# Altium PCB Driver_ampli.PcbDoc
Units mm, origin at the board's own origin, x right, y up, seen from the top; angles counter-clockwise.
Board outline 39 x 30 mm, 2 copper layers (Top Layer, Bottom Layer); 23 components, 10 nets, 48 pads, 0 vias.
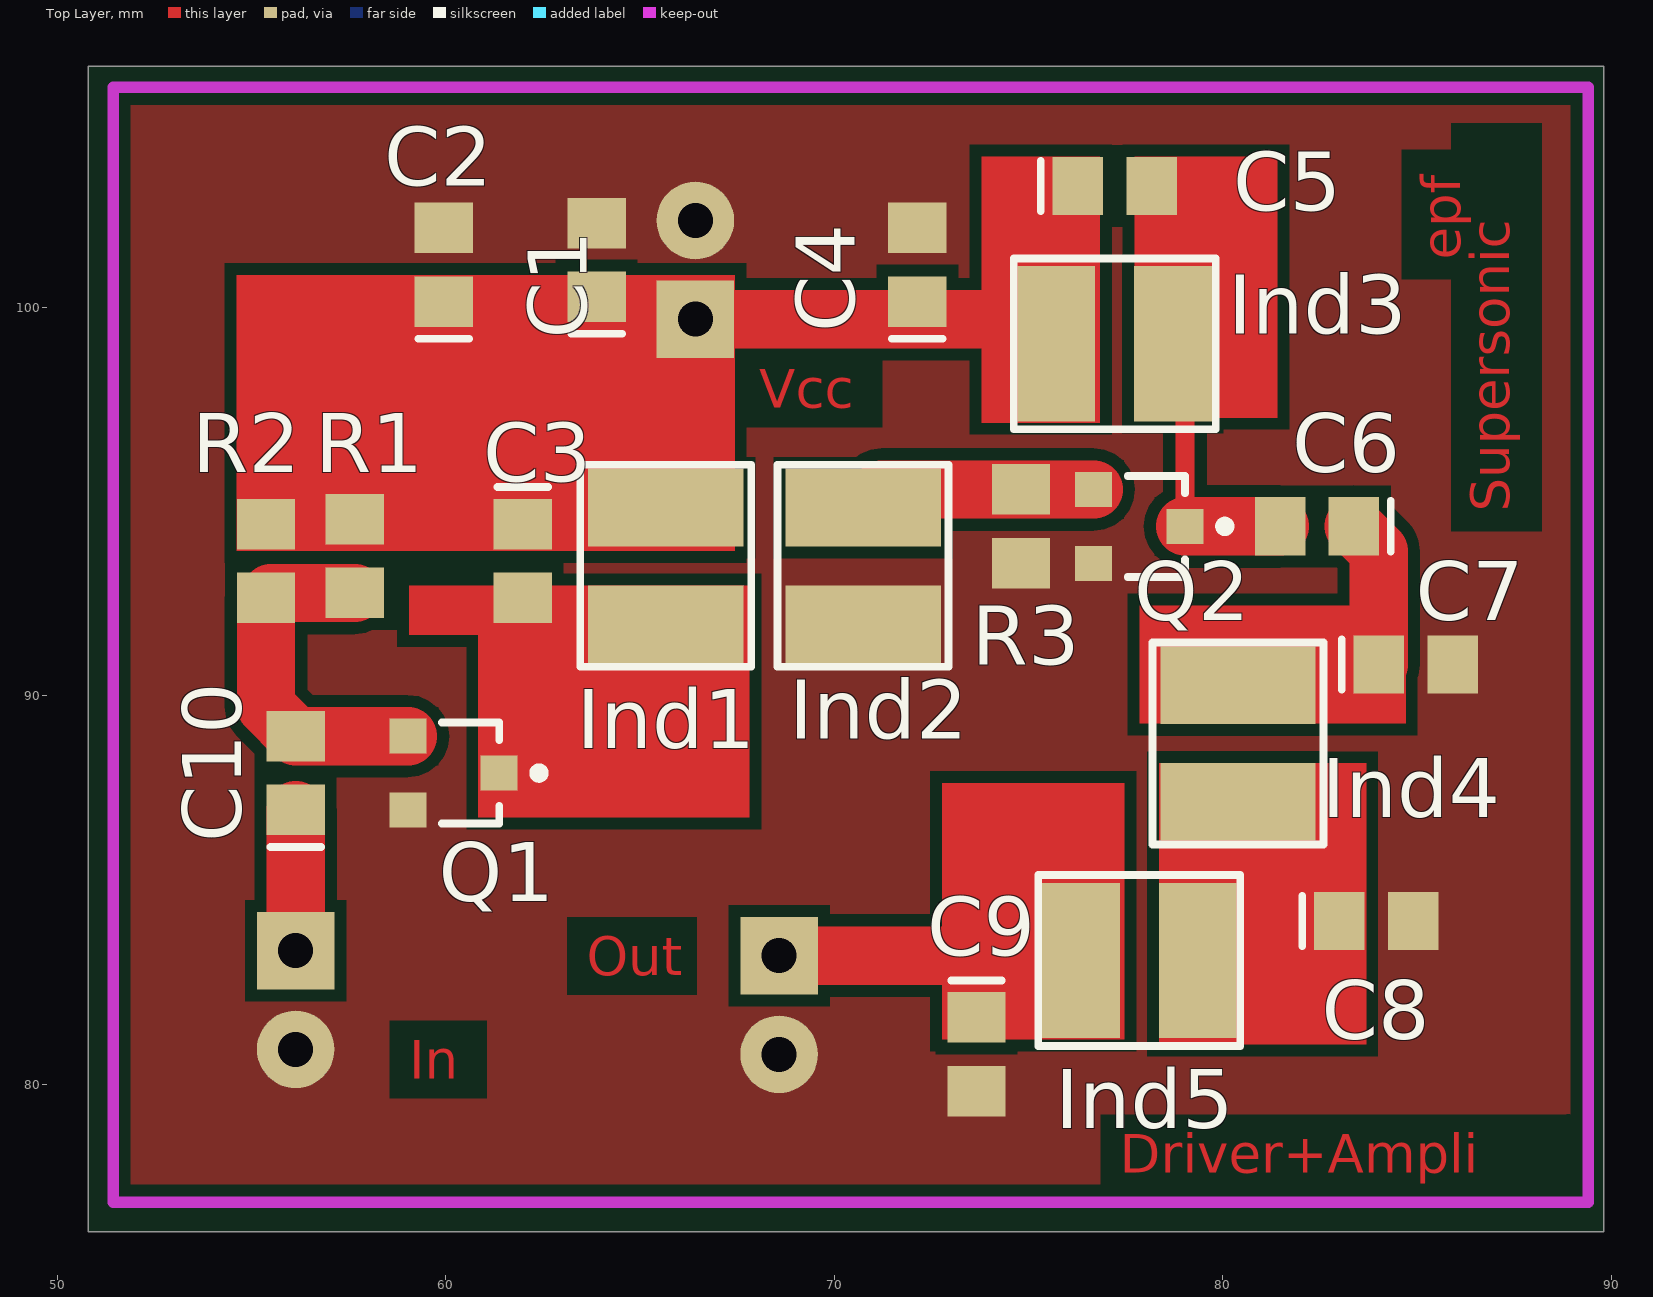
[diagram p0: Top Layer view]
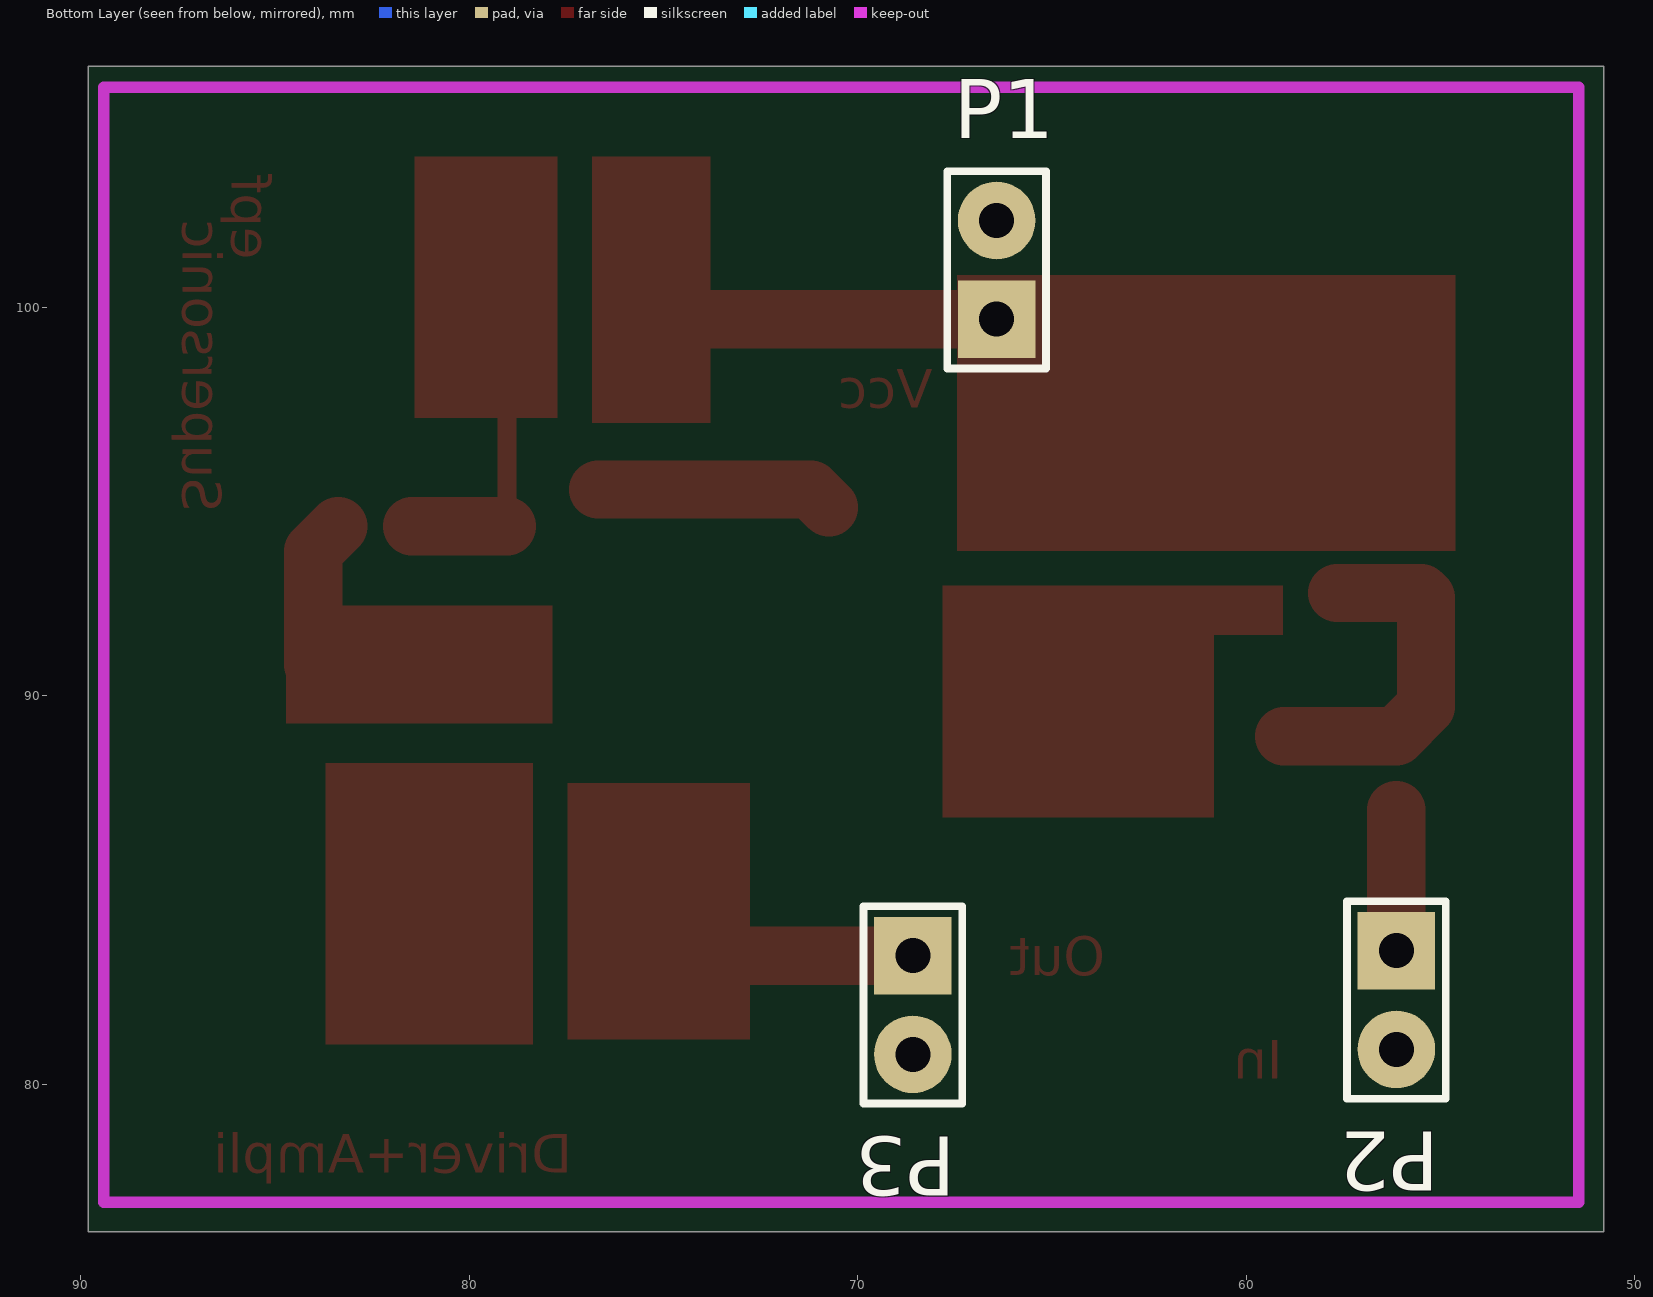
[diagram p1: Bottom Layer view, seen from below]

## Layer stack, top to bottom
Top Layer: signal copper 0.0356
Dielectric: dielectric 0.32, FR-4, Dk 4.8
Bottom Layer: signal copper 0.0356

## Board outline
50.8,76.2 89.8,76.2 89.8,106.2 50.8,106.2

## Design rules (kind name [scope] priority, off if disabled: settings)
Clearance [All] p1: gap=0.3
ComponentClearance [All] p1: gap=0.254 collisioncheckmode=3 verticalgap=0.254
PolygonConnect [All] p1: connectstyle=Direct reliefconductorwidth=0.254 reliefentries=4 polygonreliefangle="90 Angle"
RoomDefinition Driver_Ampli [InComponentClass('Driver_Ampli')] p1: confinementstyle=ConfineIn formatcopy=TRUE lockcomponents=FALSE outline 50.038,75.438 90.932,75.438 90.932,107.442 50.038,107.442
RoutingVias [All] p1: holewidth=0.8 width=2 viastyle="Through Hole" minholewidth=0.711 minwidth=1.27 maxholewidth=1 maxwidth=3
SolderMaskExpansion [All] p1: expansion=0.102
TestPointUsage [All] p1: valid=0 allowmultiple=FALSE
Testpoint [All] p1: side=15 testpointundercomponent=TRUE minsize=1.016 maxsize=2.54 preferedsize=1.524 minholesize=0 maxholesize=1.016 preferedholesize=0.813 testpointgrid=0.025 style=1023 order=0-112345678
Width [All] p1: maxlimit=3 minlimit=0.5 preferedwidth=1.5
18 further rules are at their usual default settings.

## Components (designator, comment, footprint, x,y, rotation, side; value= is the part's Value field where it differs from the comment)
C1 "Cap Pol3" C0805 63.881,101.219 r90 top
C2 "Cap Pol3" C0805 59.944,101.092 r90 top
C3 "Cap Pol3" C0805 61.976,93.472 r270 top
C4 "Cap Pol3" C0805 72.136,101.092 r90 top
C5 "Cap Pol3" C0805 77.216,103.124 r0 top
C6 "Cap Pol3" C0805 82.423,94.361 r180 top
C7 "Cap Pol3" C0805 84.963,90.805 r0 top
C8 "Cap Pol3" C0805 83.947,84.201 r0 top
C9 "Cap Pol3" C0805 73.66,80.772 r270 top
C10 "Cap Pol3" C0805 56.134,88.011 r90 top
Ind1 "Ind2" Ind_3mm 65.659,93.345 r270 top
Ind2 "Ind2" Ind_3mm 70.739,93.345 r270 top
Ind3 "Ind2" Ind_3mm 77.216,99.06 r0 top
Ind4 "Ind2" Ind_3mm 80.391,88.773 r270 top
Ind5 "Ind2" Ind_3mm 77.851,83.185 r180 top
P1 "Header 2" HDR1X2 66.421,99.695 r90 bottom
P2 "Header 2" HDR1X2 56.134,83.439 r270 bottom
P3 "Header 2" HDR1X2 68.58,83.312 r270 bottom
Q1 "BFS17" SOT23 60.198,88.011 r270 top
Q2 "BFS17" SOT23 77.851,94.361 r270 top
R1 "Res Semi" 2012[0805] 57.658,93.599 r90 top
R2 "Res Semi" 2012[0805] 55.372,93.472 r90 top
R3 "Res Semi" 2012[0805] 74.803,94.361 r90 top

## Footprints (in the part's own frame and the unit in brackets; to place one, negate y for a bottom-side part, rotate by r counter-clockwise, add the part's x,y. Pads: shape width x height; smd on the part's side, far side on the other; paste and mask are expansions set on the pad)
2012[0805] [mm] "Chip Resistor; Body 2.0 x 1.3 mm (LxW typ)"
  rect 1.3x1.5 smd: 1(-0.95,0) 2(0.95,0)
C0805 [mm] "Chip Capacitor; Body 2.0 x 1.2 mm (LxW typ)"
  rect 1.3x1.5 smd: 1(-0.95,0) 2(0.95,0)
  silkscreen extent -1.9,-0.65 -1.9,0.65
HDR1X2 [mm] "Connector; Header; 2 Position"
  rect 2x2 hole 0.9: 1(0,0)
  round 2 hole 0.9: 2(2.54,0)
  silkscreen extent -1.27,-1.27 3.81,1.27
Ind_3mm [mm]
  rect 2x4 smd: 1(-1.5,0) 2(1.5,0)
  silkscreen extent -2.6,-2.2 2.6,2.2
SOT23 [mm] "SOT-23; 3 Leads; Body 3.0 x 2.5 mm, inc. leads (LxW max)"
  rect 0.9x0.95 smd: 1(-0.95,-1.175) 2(0.95,-1.175) 3(0,1.175)
  silkscreen extent -1.3,-0.3 1.3,2.33

## Part data
C1 C2 C3 C4 C5 C6 C7 C8 C9 C10: "Polarized Capacitor (Surface Mount)"
P1 P2 P3: "Header, 2-Pin"
Q1 Q2: "NPN 1 GHz Wideband Transistor"
R1 R2 R3: "Semiconductor Resistor"

## Nets (pads, with @x,y where several pads share a name; then routed paths per layer and width w, separated by ;. In a path a pad name is that pad's centre, name@x,y a point inside that pad or via, vN(x,y) a via of type N, cw(c..) or ccw(c..) an arc to the next point about the centre after c; other vN are vias at no path point)
B1: C10.2 Q1.1 R1.1 R2.1 | length 9.1
  Top Layer w1.5: R1.1 55.499,92.649 R2.1 55.372,89.723 C10.2 Q1.1
B2: Ind2.1 Q2.1 R3.2 | length 6.1
  Top Layer w1.5: Ind2.1 71.205,95.311 R3.2 Q2.1
C1: C3.2 Ind1.2 Q1.3
C2: C5.2 C6.2 Ind3.2 Q2.3 | length 7.3
  Top Layer w0.5: Ind3.2 79.026,98.75 Q2.3
  Top Layer w1.5: Q2.3 C6.2
E1: C1.2 C2.2 C4.2 C7.2 C8.2 C9.2 Ind2.2 P1.2 P2.2 P3.2 Q1.2 Q2.2 R3.1
NetC6_1: C6.1 C7.1 Ind4.1 | length 3.8
  Top Layer w1.5: C6.1 84.013,93.721 C7.1
NetC8_1: C8.1 Ind4.2 Ind5.1
NetC9_1: C9.1 Ind5.2 P3.1 | length 7.8
  Top Layer w1.5: P3.1 76.224,83.312 Ind5.2
NetC10_1: C10.1 P2.1 | length 3.6
  Top Layer w1.5: P2.1 C10.1
VCC: C1.1 C2.1 C3.1 C4.1 C5.1 Ind1.1 Ind3.1 P1.1 R1.2 R2.2 | length 8.7
  Top Layer w1.5: P1.1 Ind3.1@75.081,99.695

## Polygon pours and split planes (outlines as drawn)
E1 on Top Layer (solid, remove dead copper): 51.054,106.045 51.054,76.581 89.662,76.581 89.662,105.918

## Keep-outs
Keep-Out Layer:
  lines w0.3: 51.435,76.962 89.408,76.962 89.408,105.664 51.435,105.664 51.435,76.962

## Other copper
Top Layer:
  rectangle net VCC: 73.787,97.028 76.835,103.886
  rectangle net C2: 77.724,97.155 81.407,103.886
  rectangle net C1: 59.055,91.567 62.865,92.837
  rectangle net NetC9_1: 72.771,81.153 77.47,87.757
  rectangle net NetC8_1: 78.359,81.026 83.693,88.265
  rectangle net NetC6_1: 77.851,89.281 84.709,92.329
  rectangle net VCC: 54.61,93.726 67.437,100.838
  rectangle net C1: 60.833,86.868 67.818,92.837
  text "epf" at 86.106,101.219 h1 r90
  text "Vcc" at 68.072,97.409 h1
  text "Supersonic" at 87.376,94.742 h1 r90
  text "Out" at 63.627,82.804 h1
  text "In" at 59.055,80.137 h1
  text "Driver+Ampli" at 77.343,77.724 h1

## Silkscreen, mask and mechanical layers (free items; w line width, h text height)
Drill Drawing:
  text ".LEGEND" at 94.88,81.28 h1.52
  text "Drill Drawing." at 94.88,78.74 h1.52

## Dimensions
51.435,76.962 to 89.408,76.962 on Mechanical 1
51.435,76.962 to 51.435,105.664 on Mechanical 1